# EAGLE board Motor-Driver-Module v38 (EAGLE 9.7.0)
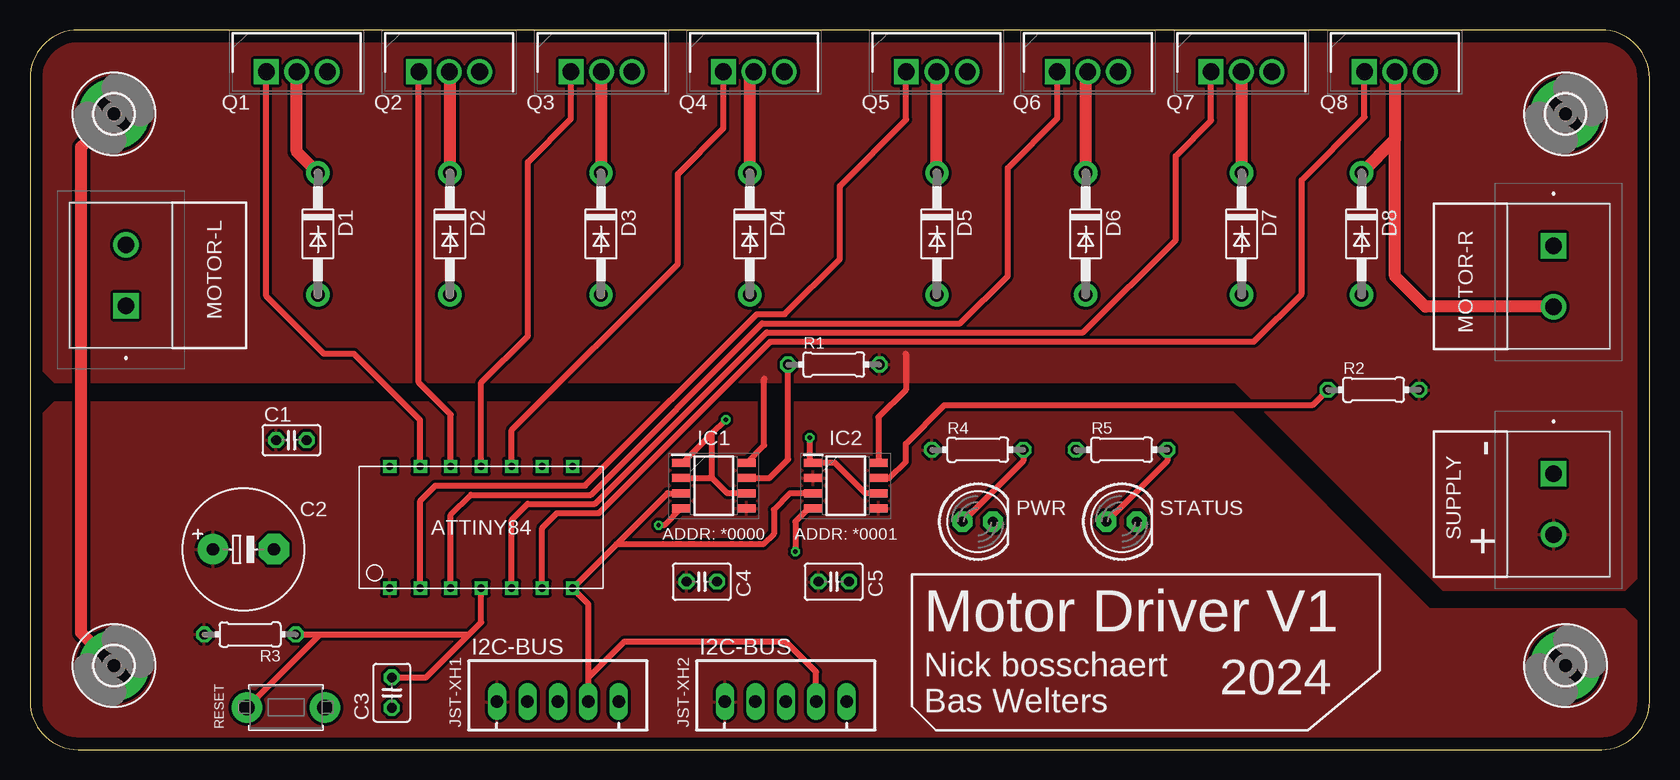
[diagram p0: board, top side]
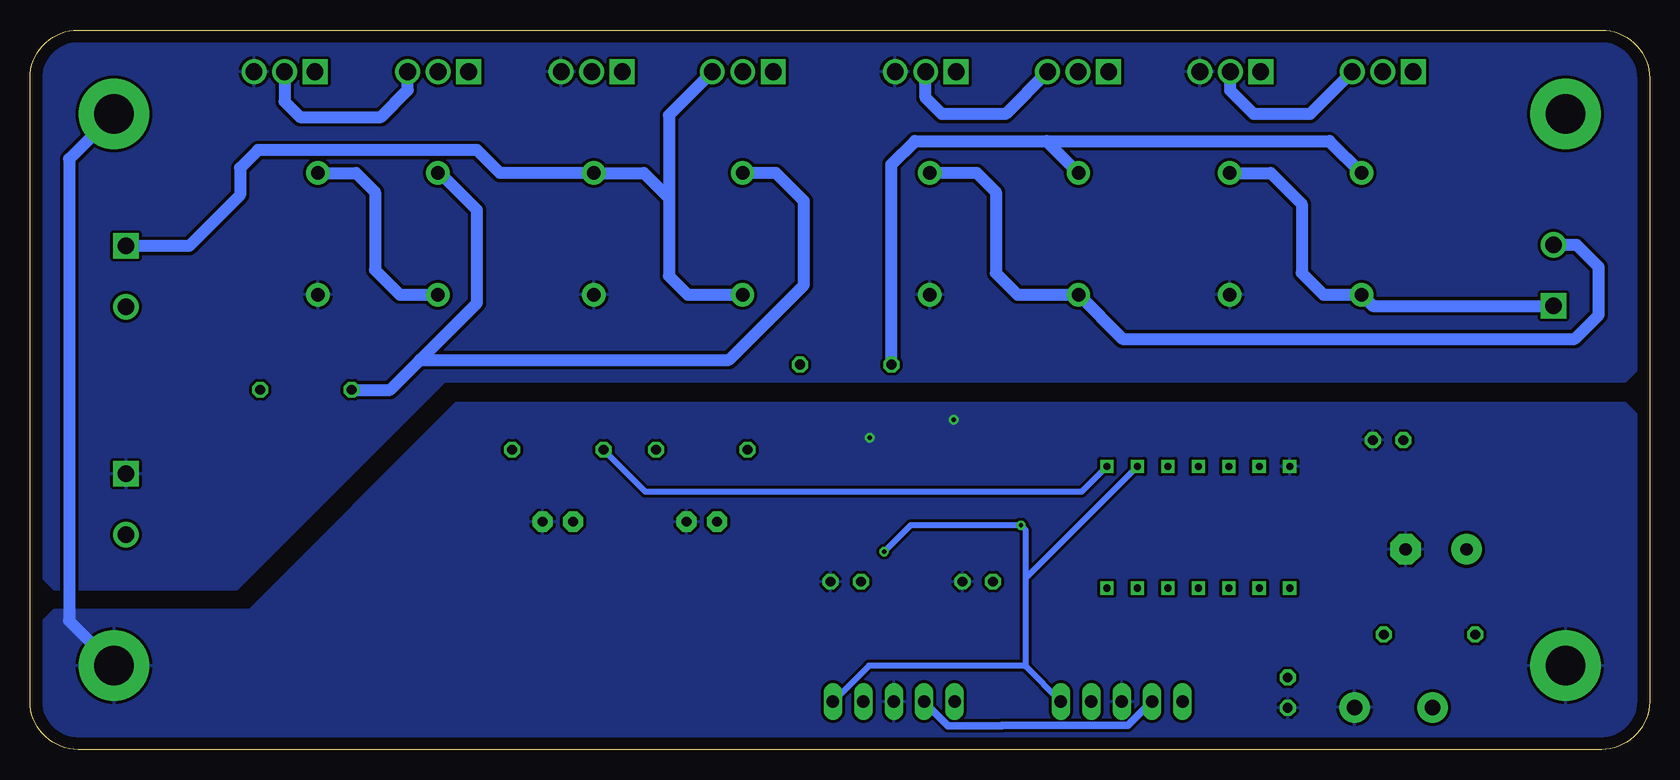
[diagram p1: board, bottom side, seen from below]

Size 135 x 60 mm. Coordinates in mm from the lower left corner, seen from the top.
Outline: 0,56 0,4 arc90 4,0 131,0 arc90 135,4 135,56 arc90 131,60 4,60 arc90 0,56
Copper layers (1*16): Top 0.035mm / dielectric 1.5mm / Bottom 0.035mm
Design rules "default *": minimum track width 10mil, minimum drill 0.35mm, track to track 10mil, track to pad 6mil, pad to pad 6mil, via to via 6mil, smd to smd 6mil, copper to edge 40mil, drill to drill 6mil, minimum pad ring 10mil, minimum via ring 8mil, stop-mask expansion 4mil, vias tented up to drill 0mil, thermal gap 10mil

## Footprints (pad centres in the part's own frame; a part is rotated, then mirrored left to right if it is on the bottom)
C025-025X050 = drill 0.813 octagon: 1 -1.27,0; 2 1.27,0
E5-10,5 = drill 1.016 pad 2.54: + -2.54,0 | drill 1.016 pad 2.54 octagon: - 2.54,0
C025-030X050 = drill 0.813 octagon: 1 -1.27,0; 2 1.27,0
DO41-10 = drill 1.118 pad 1.93: A 5.08,0; C -5.08,0
3,3-PAD = drill 3.3 pad 5.842: B3,3 0,0
SOIC127P600X175-8N = smd 1.528 x 0.65: 1 -2.711,1.905; 2 -2.711,0.635; 3 -2.711,-0.635; 4 -2.711,-1.905; 5 2.711,-1.905; 6 2.711,-0.635; 7 2.711,0.635; 8 2.711,1.905
JST-XH-05-PACKAGE-LONG-PAD = drill 1.016 long: 1 -5.08,0; 2 -2.54,0; 3 0,0; 4 2.54,0; 5 5.08,0
1747993 = drill 1.4 pad 2.1 square: 1 0,0 | drill 1.4 pad 2.1: 2 5.08,0
LED5MM = drill 0.813 pad 1.676 octagon: A -1.27,0; K 1.27,0
TO254P483X1016X1994-3P = drill 1.38 pad 2.07 square: 1 0,0 | drill 1.38 pad 2.07: 2 2.54,0; 3 5.08,0
0204/7 = drill 0.813 octagon: 1 -3.81,0; 2 3.81,0
TACT_PANA-EVQ = drill 1.3 pad 2.54: P$1 -3.25,0; P$2 3.25,0
ATTINY84(DIP) = drill 0.6 square: GND 10.16,0; PA0 10.16,-2.54; PA1 10.16,-5.08; PA2 10.16,-7.62; PA3 10.16,-10.16; PA4 10.16,-12.7; PA5 10.16,-15.24; PA6 0,-15.24; PA7 0,-12.7; PB0 0,-2.54; PB1 0,-5.08; PB2 0,-10.16; PB3 0,-7.62; VCC 0,0

## Placement (x,y rotation side)
C1  0.1uF  [C025-025X050]  21.79,25.8 0 top
C2  10uF  [E5-10,5]  17.79,16.69 0 top
C3  0.1uF  [C025-030X050]  30.16,4.74 90 top
C4  0.1uF  [C025-030X050]  56,14 0 top
C5  0.1uF  [C025-030X050]  67,14 0 top
D1  [DO41-10]  24,43 270 top
D2  [DO41-10]  35,43 270 top
D3  [DO41-10]  47.6,43 270 top
D4  [DO41-10]  60,43 270 top
D5  [DO41-10]  75.6,43 270 top
D6  [DO41-10]  88,43 270 top
D7  [DO41-10]  101,43 270 top
D8  [DO41-10]  111,43 270 top
H1  MOUNT-PAD-ROUND3.3  [3,3-PAD]  7,7 0 top
H2  MOUNT-PAD-ROUND3.3  [3,3-PAD]  128,7 0 top
H3  MOUNT-PAD-ROUND3.3  [3,3-PAD]  128,53 0 top
H4  MOUNT-PAD-ROUND3.3  [3,3-PAD]  7,53 0 top
IC1  INA219BIDR  [SOIC127P600X175-8N]  57,22 0 top
IC2  INA219BIDR  [SOIC127P600X175-8N]  68,22 0 top
JST-XH1  I2C-BUS  [JST-XH-05-PACKAGE-LONG-PAD]  44,4 0 top
JST-XH2  I2C-BUS  [JST-XH-05-PACKAGE-LONG-PAD]  63,4 0 top
MOTOR-L  1747993  [1747993]  8,37 90 top
MOTOR-R  1747993  [1747993]  127,42 270 top
PWR  GN  [LED5MM]  79,19 0 top
Q1  IRFB7430PBF  [TO254P483X1016X1994-3P]  19.7,56.52 0 top
Q2  IRFB7430PBF  [TO254P483X1016X1994-3P]  32.4,56.52 0 top
Q3  IRFB7430PBF  [TO254P483X1016X1994-3P]  45.1,56.52 0 top
Q4  IRFB7430PBF  [TO254P483X1016X1994-3P]  57.8,56.52 0 top
Q5  IRFB7430PBF  [TO254P483X1016X1994-3P]  73.04,56.52 0 top
Q6  IRFB7430PBF  [TO254P483X1016X1994-3P]  85.64,56.52 0 top
Q7  IRFB7430PBF  [TO254P483X1016X1994-3P]  98.44,56.52 0 top
Q8  IRFB7430PBF  [TO254P483X1016X1994-3P]  111.24,56.52 0 top
R1  12m  [0204/7]  67,32.1 0 top
R2  12m  [0204/7]  112,30 0 top
R3  10k  [0204/7]  18.34,9.59 180 top
R4  220  [0204/7]  79,25 0 top
R5  220  [0204/7]  91,25 0 top
RESET  [TACT_PANA-EVQ]  21.34,3.51 180 top
STATUS  RD  [LED5MM]  91,19 0 top
SUPPLY  1747993  [1747993]  127,23 270 top
U$1  ATTINY84DIP  [ATTINY84(DIP)]  29.99,13.45 90 top

## Library data of the parts
C1-C5 = rcl; SPICEPREFIX: C
D1-D8 PWR RESET STATUS = adafruit
H1-H4 = holes
IC1 IC2 = SamacSys_Parts; DESCRIPTION: 26-V, Bidirectional, Zero-Drift, High-Side, I2C Out Current/Power Monitor; HEIGHT: 1.75mm; MANUFACTURER_NAME: Texas Instruments; MANUFACTURER_PART_NUMBER: INA219BIDR; MOUSER_PART_NUMBER: 595-INA219BIDR; MOUSER_PRICE-STOCK: https://www.mouser.co.uk/ProductDetail/Texas-Instruments/INA219BIDR?qs=1WmUhT%2FVMINyGsXNJcdD5Q%3D%3D
JST-XH1 JST-XH2 = Rembrandt Electronics - JST XH Connectors v1-0
MOTOR-L MOTOR-R SUPPLY = SamacSys_Parts; DESCRIPTION: PCB header, nominal cross section: 2.5 mm?, color: green, nominal current: 12 A, rated voltage (III/2): 320 V, contact surface: Gold, type of contact: Male connector, Number of potentials: 2, Number of rows: 1, Number of positions per row: 2, number of connections: 2, product range: MSTBVA 2,5/..-G, pitch: 5.08 mm, mounting: Wave soldering, pin layout: Linear pinning, solder pin [P]: 3.9 mm, Stecksystem: CLASSIC COMBICON, Locking: without, type of packaging: packed in cardboard; HEIGHT: 12.15mm; MANUFACTURER_NAME: Phoenix Contact; MANUFACTURER_PART_NUMBER: 1747993; MOUSER_PART_NUMBER: 651-1747993; MOUSER_PRICE-STOCK: https://www.mouser.co.uk/ProductDetail/Phoenix-Contact/1747993?qs=cq3Rj917t3li0%2FrJTXaRgg%3D%3D
Q1-Q8 = SamacSys_Parts; DESCRIPTION: Infineon IRFB7430PBF N-channel MOSFET, 195 A, 40 V StrongIRFET, 3-Pin TO-220AB; HEIGHT: 4.83mm; MANUFACTURER_NAME: Infineon; MANUFACTURER_PART_NUMBER: IRFB7430PBF; MOUSER_PART_NUMBER: 942-IRFB7430PBF; MOUSER_PRICE-STOCK: https://www.mouser.co.uk/ProductDetail/Infineon-Technologies/IRFB7430PBF?qs=PRpJrl6HpdwkCaEhLAouSA%3D%3D
R1-R5 = rcl; SPICEPREFIX: R
U$1 = RobotMower_Eagle_Library

## Nets
3V3: JST-XH1.2 JST-XH2.2
5V: C1.1 C2.+ C4.1 C5.1 IC1.5 IC2.2 IC2.5 JST-XH1.1 JST-XH2.1 R3.2 R4.1 U$1.VCC
BAT+: IC1.8 IC2.8 R1.2 R2.2 SUPPLY.2
BAT-: D2.A D4.A D6.A D8.A Q2.3 Q4.3 Q6.3 Q8.3 SUPPLY.1
GND: C1.2 C2.- C3.1 C4.2 C5.2 H1.B3,3 H2.B3,3 H3.B3,3 H4.B3,3 IC1.1 IC1.2 IC1.6 IC2.1 IC2.6 JST-XH1.3 JST-XH2.3 PWR.K RESET.P$1 STATUS.K U$1.GND
N$1: D3.A D4.C MOTOR-L.2 Q3.3 Q4.2
N$2: D1.A D2.C MOTOR-L.1 Q1.3 Q2.2
N$3: D7.A D8.C MOTOR-R.2 Q7.3 Q8.2
N$4: D5.A D6.C MOTOR-R.1 Q5.3 Q6.2
N$5: D1.C D3.C IC1.7 Q1.2 Q3.2 R1.1
N$6: D5.C D7.C IC2.7 Q5.2 Q7.2 R2.1
N$7: R5.1 U$1.PA5
N$8: R5.2 STATUS.A
N$9: PWR.A R4.2
Q1M1: Q1.1 U$1.PA0
Q1M2: Q5.1 U$1.PB0
Q2M1: Q2.1 U$1.PA1
Q2M2: Q6.1 U$1.PB1
Q3M1: Q3.1 U$1.PA2
Q3M2: Q7.1 U$1.PB2
Q4M1: Q4.1 U$1.PA3
Q4M2: Q8.1 U$1.PA7
RST: C3.2 R3.1 RESET.P$2 U$1.PB3
SCL: IC1.4 IC2.4 JST-XH1.5 JST-XH2.5 U$1.PA4
SDA: IC1.3 IC2.3 JST-XH1.4 JST-XH2.4 U$1.PA6

## Tracks (layer width: path | path; a pad name or v marks a point on that pad's centre or on a via)
3V3
  Bottom 0.61: JST-XH1.2 41.51,4 43.49,2.02 53.98,2.02 54,2 58.46,2 JST-XH2.2
5V
  pour Top: 134.92,9.72 132.97,11.67 116.73,11.67 116.71,11.69 99.47,28.92 2.03,28.92 0.08,26.97 0.08,0.08 134.92,0.08
BAT+
  Top 0.508: IC1.8 61.2,25.39 61.2,30.9 | IC2.8 70.71,27.71 73,30 73,33
  pour Top: 0.08,32.58 2.03,30.63 100.47,30.63 100.49,30.61 117.78,13.33 132.97,13.33 134.92,15.28 134.92,59.92 2.03,59.92 0.08,57.97
BAT-
  pour Bottom: 0.08,32.58 2.03,30.63 100.47,30.63 100.49,30.61 117.78,13.33 132.97,13.33 134.92,15.28 134.92,59.92 2.03,59.92 0.08,57.97
GND  (via drill 0.35)
  Top 0.508: v65,26 65,24.19 IC2.1 67.09,23.91 69.64,21.36 IC2.6 | IC1.6 58.13,21.36 56.87,22.64 | IC1.2 56.87,22.64 | 56.87,22.64 56.87,26.36 | 56.87,26.36 v58,27.5 | IC1.1 54.41,23.91 56.87,26.36
  Top 1.016: H1.B3,3 4.25,9.75 4.25,50.25 H4.B3,3
  Bottom 1.016: H3.B3,3 131.75,49.25 131.75,10.75 H2.B3,3
  pour Bottom: 134.92,9.72 132.97,11.67 116.73,11.67 116.71,11.69 99.47,28.92 2.03,28.92 0.08,26.97 0.08,0.08 134.92,0.08
N$1
  Top 1.016: D4.C 60,56.18 Q4.2
  Bottom 1.016: D4.C 56.08,48.08 54.5,46.5 54.5,39.75 52.67,37.92 D3.A 43.93,34.25 6.25,34.25 4.25,36.25 4.25,40.25 6.08,42.08 MOTOR-L.2 | Q3.3 53.7,53 59,53 60.34,54.34 Q4.2
N$2
  Top 1.016: D2.C 35,56.46 Q2.2
  Bottom 1.016: D2.C 31.58,48.08 29,45.5 29,39.75 27.17,37.92 D1.A 23.08,37 MOTOR-L.1 | Q1.3 28.3,53 33,53 34.94,54.94 Q2.2
N$3
  Top 1.016: D8.C 113.78,50.86 | Q8.2 113.78,50.86 | MOTOR-R.2 116.33,36.92 113.78,39.47 113.78,50.86
  Bottom 1.016: D8.C 107.83,48.08 106.25,46.5 106.25,40 104.17,37.92 D7.A | Q8.2 113.78,54.03 112.5,52.75 105.75,52.75 103.52,54.98 Q7.3
N$4
  Top 1.016: D6.C 88,56.34 Q6.2
  Bottom 1.016: 81.75,46 83.83,48.08 D6.C 95.83,48.08 97.75,50 116,50 117.5,48.5 117.5,46.25 121.75,42 MOTOR-R.1 | 81.75,46 81.75,39.5 80.17,37.92 D5.A | Q5.3 81.75,52.89 81.75,46
N$5
  Top 0.508: IC1.7 61.63,22.64 63.19,24.19 R1.1
  Top 1.016: D3.C 47.64,48.12 Q3.2 | D1.C 22.24,49.84 Q1.2
  Bottom 1.016: R1.1 63.19,48.81 61.25,50.75 50.27,50.75 | D3.C 50.27,50.75 | 50.27,50.75 26.67,50.75 D1.C
N$6
  Top 0.508: IC2.7 71.64,22.64 73,24 73,25.5 76.2,28.7 106.89,28.7 R2.1
  Top 1.016: D7.C 101,56.5 Q7.2 | D5.C 75.58,48.1 Q5.2
  Bottom 1.016: R2.1 105,30 102.5,32.5 | 102.5,32.5 97.75,37.25 97.75,45 100.83,48.08 D7.C | 102.5,32.5 76.75,32.5 70.5,38.75 70.5,45.75 72.83,48.08 D5.C
N$7
  Bottom 0.508: R5.1 83.69,21.5 47.34,21.5 U$1.PA5
N$8
  Top 0.508: R5.2 94.81,24.08 STATUS.A
N$9
  Top 0.508: R4.2 82.81,24.08 PWR.A
Q1M1
  Top 0.508: U$1.PA0 32.5,23.64 32.5,27.5 27,33 24.5,33 19.7,37.8 Q1.1
Q1M2
  Top 0.508: U$1.PB0 32.53,20.73 33.81,22.01 46.28,22.01 60.6,36.3 62.9,36.3 67.5,40.9 67.5,47 73.04,52.54 Q5.1
Q2M1
  Top 0.508: U$1.PA1 35.07,27.93 32.4,30.6 Q2.1
Q2M2
  Top 0.508: U$1.PB1 35.07,19.57 36.75,21.25 46.75,21.25 61.04,35.54 77.54,35.54 81.5,39.5 81.5,48.5 85.64,52.64 Q6.1
Q3M1
  Top 0.508: U$1.PA2 37.61,30.61 41.5,34.5 41.5,49 45.1,52.6 Q3.1
Q3M2
  Top 0.508: U$1.PB2 40.15,19.15 41.49,20.49 47.11,20.49 61.4,34.78 87.78,34.78 95.5,42.5 95.5,49.5 98.44,52.44 Q7.1
Q4M1
  Top 0.508: U$1.PA3 40.15,26.65 54,40.5 54,48 57.8,51.8 Q4.1
Q4M2
  Top 0.508: U$1.PA7 42.69,18.49 43.93,19.73 47.43,19.73 61.71,34.01 102.01,34.01 106,38 106,47.5 111.24,52.74 Q8.1
RST
  Top 0.508: C3.2 33.01,6.01 36.59,9.59 | U$1.PB3 37.61,10.61 36.59,9.59 | R3.1 24.17,9.59 | 36.59,9.59 27,9.59 24.17,9.59 | RESET.P$2 24.17,9.59
SCL  (via drill 0.35)
  Top 0.508: IC2.4 64.89,20.09 63.8,19.01 v63.8,16.5 | IC1.4 52.89,18.7 v52.4,18.7
  Bottom 0.508: JST-XH1.5 52,6.92 | 52,6.92 52.08,7 65.08,7 JST-XH2.5 | U$1.PA4 52,14.3 | 52,6.92 52,14.3 | 52,14.3 52,18.3 v52.4,18.7 61.6,18.7 v63.8,16.5
SDA
  Top 0.508: 46.54,6 46.54,12.14 U$1.PA6 48.89,17.11 | 46.54,6 JST-XH1.4 | JST-XH2.4 65.54,6.46 63,9 49.54,9 46.54,6 | 48.89,17.11 53.15,21.36 IC1.3 | IC2.3 63.37,21.36 62,20 62,18 61.11,17.11 48.89,17.11

## Text on the board
tPlace: + - | ADDR: *0000 | ADDR: *0001 | Motor Driver V1 | 2024 | Nick bosschaert / Bas Welters